# EAGLE board simulador (EAGLE 9.6.2)
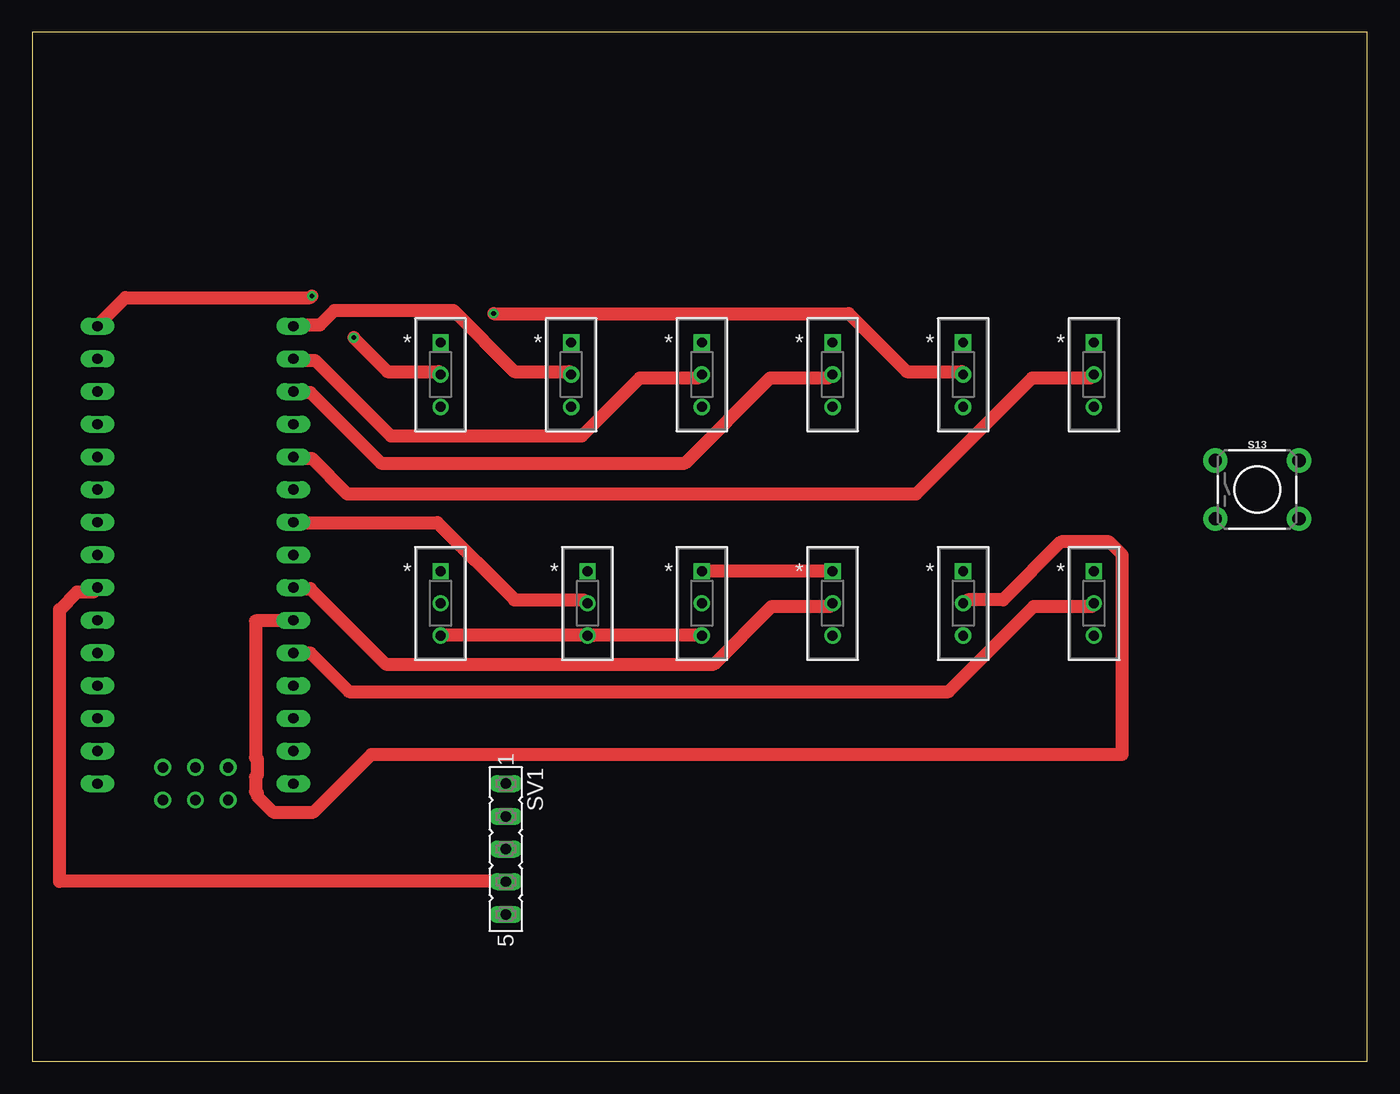
[diagram p0: board, top side]
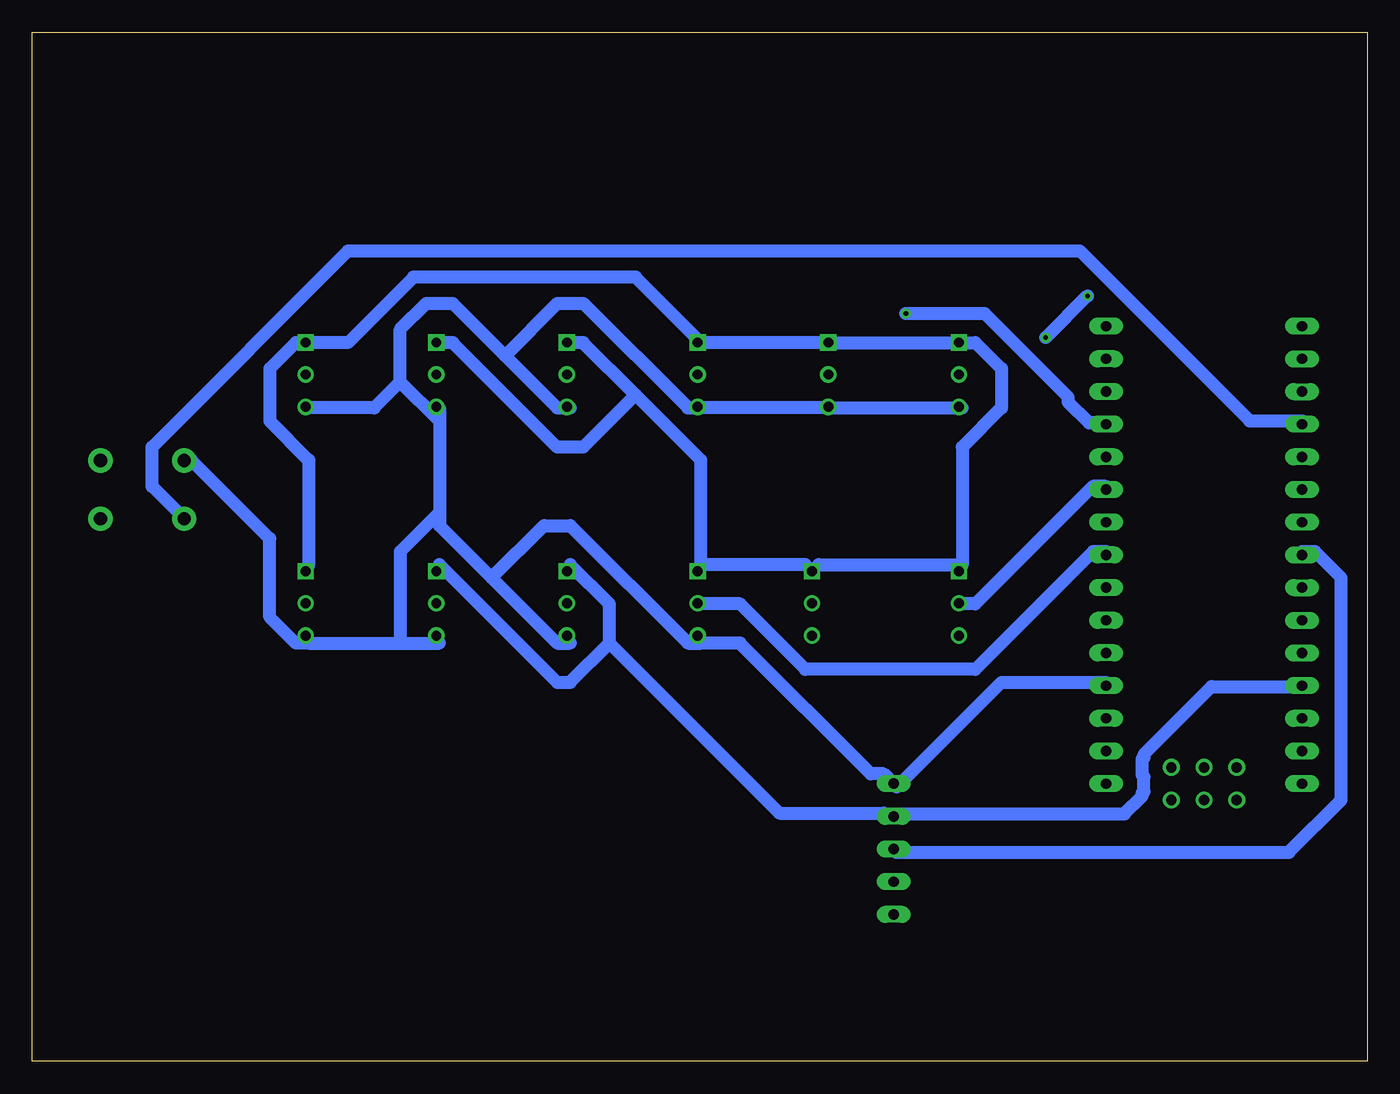
[diagram p1: board, bottom side, seen from below]

Size 103.81 x 80 mm. Coordinates in mm from the lower left corner, seen from the top.
Outline: 0,0 103.81,0 103.81,80 0,80 0,0
Copper layers (1*16): Top 0.035mm / dielectric 1.5mm / Bottom 0.035mm
Design rules "default *": minimum track width 40mil, minimum drill 0.35mm, track to track 40mil, track to pad 40mil, pad to pad 40mil, via to via 40mil, smd to smd 6mil, copper to edge 40mil, drill to drill 6mil, minimum pad ring 10mil, minimum via ring 8mil, stop-mask expansion 4mil, vias tented up to drill 0mil, thermal gap 10mil

## Footprints (pad centres in the part's own frame; a part is rotated, then mirrored left to right if it is on the bottom)
TACTILE_SWITCH_PTH_6.0MM_KIT = drill 1.016 pad 1.88: 1 -3.251,2.261; 2 3.251,2.261; 3 -3.251,-2.261; 4 3.251,-2.261
FE05-1 = drill 0.813 long: 1 -5.08,0; 2 -2.54,0; 3 0,0; 4 2.54,0; 5 5.08,0
1P2T_SS-12D00_CNK = drill 0.762 pad 1.27 square: 1 0,0 | drill 0.762 pad 1.27: 2 0,-2.489; 3 0,-5.004
NANO = drill 0.8 long: 3.3V -10.16,24.13; 5V -10.16,-1.27; A0 -10.16,19.05; A1 -10.16,16.51; A2 -10.16,13.97; A3 -10.16,11.43; A4 -10.16,8.89; A5 -10.16,6.35; A6 -10.16,3.81; A7 -10.16,1.27; AREF -10.16,21.59; D2 5.08,1.27; D3 5.08,3.81; D4 5.08,6.35; D5 5.08,8.89; D6 5.08,11.43; D7 5.08,13.97; D8 5.08,16.51; D9 5.08,19.05; D10 5.08,21.59; D11 5.08,24.13; D12 5.08,26.67; D13 -10.16,26.67; GND -10.16,-6.35; GND1 5.08,-1.27; RAW -10.16,-8.89; RST -10.16,-3.81; RST1 5.08,-3.81; RX1 5.08,-6.35; TX0 5.08,-8.89 | drill 0.8: ICSP1 -5.08,-10.16; ICSP2 -5.08,-7.62; ICSP3 -2.54,-10.16; ICSP4 -2.54,-7.62; ICSP5 0,-10.16; ICSP6 0,-7.62

## Placement (x,y rotation side)
S13  MOMENTARY-SWITCH-SPST-PTH-6.0MM-KIT  [TACTILE_SWITCH_PTH_6.0MM_KIT]  95.25,44.45 0 top
SV1  Display  [FE05-1]  36.83,16.51 270 top
SW1  SS-12D00-G_4_E  [1P2T_SS-12D00_CNK]  31.75,55.88 0 top
SW2  SS-12D00-G_4_E  [1P2T_SS-12D00_CNK]  41.91,55.88 0 top
SW3  SS-12D00-G_4_E  [1P2T_SS-12D00_CNK]  52.07,55.88 0 top
SW4  SS-12D00-G_4_E  [1P2T_SS-12D00_CNK]  62.23,55.88 0 top
SW5  SS-12D00-G_4_E  [1P2T_SS-12D00_CNK]  72.39,55.88 0 top
SW6  SS-12D00-G_4_E  [1P2T_SS-12D00_CNK]  82.55,55.88 0 top
SW7  SS-12D00-G_4_E  [1P2T_SS-12D00_CNK]  31.75,38.1 0 top
SW8  SS-12D00-G_4_E  [1P2T_SS-12D00_CNK]  43.18,38.1 0 top
SW9  SS-12D00-G_4_E  [1P2T_SS-12D00_CNK]  52.07,38.1 0 top
SW10  SS-12D00-G_4_E  [1P2T_SS-12D00_CNK]  62.23,38.1 0 top
SW11  SS-12D00-G_4_E  [1P2T_SS-12D00_CNK]  72.39,38.1 0 top
SW12  SS-12D00-G_4_E  [1P2T_SS-12D00_CNK]  82.55,38.1 0 top
U$1  NANO  [NANO]  15.24,30.48 0 top

## Library data of the parts
S13 = SparkFun-Switches; PROD_ID: SWCH-08441; SF_SKU: COM-00097
SV1 = con-lsta; OC_FARNELL: unknown; OC_NEWARK: unknown
SW1-SW12 = untitled; COPYRIGHT: Copyright (C) 2025 Ultra Librarian. All rights reserved.; MANUFACTURER_PART_NUMBER: SS-12D00-G 4 E; MFR_NAME: C&K Components; TYPE: Slide Switches
U$1 = Arduino-clone

## Nets
N$1: SV1.2 SW1.1 SW2.1 SW3.1 SW4.1 SW5.1 SW6.1 SW7.1 SW8.1 SW9.1 SW10.1 SW11.1 SW12.1 U$1.5V
N$2: S13.3 U$1.A0
N$3: SV1.3 U$1.A4
N$4: SV1.4 U$1.A5
N$5: S13.1 SV1.1 SW1.3 SW2.3 SW3.3 SW4.3 SW5.3 SW6.3 SW7.3 SW8.3 SW9.3 SW10.3 SW11.3 SW12.3 U$1.GND1
N$6: SW1.2 U$1.D13
N$7: SW2.2 U$1.D12
N$8: SW3.2 U$1.D11
N$9: SW7.2 U$1.D7
N$10: SW4.2 U$1.D10
N$11: SW5.2 U$1.D9
N$12: SW6.2 U$1.D8
N$13: SW8.2 U$1.D6
N$14: SW9.2 U$1.D5
N$15: SW10.2 U$1.D4
N$16: SW11.2 U$1.D3
N$17: SW12.2 U$1.D2

## Tracks (layer width: path | path; a pad name or v marks a point on that pad's centre or on a via)
N$1
  Top 1.016: SW10.1 62.12,38.12 52.12,38.12 SW9.1
  Bottom 1.016: 31.5,38.61 42.67,38.61 SW8.1 43.69,38.61 51.82,38.61 | SW4.1 60.96,55.88 56.9,51.82 | 56.9,51.82 51.82,46.74 51.82,38.61 | 51.82,38.61 SW9.1 | SW5.1 71.12,55.88 62.99,47.75 60.96,47.75 56.9,51.82 | SW12.1 82.3,38.61 82.3,46.74 85.34,49.78 85.34,53.85 83.31,55.88 SW6.1 79.25,55.88 74.17,60.96 56.9,60.96 51.82,55.88 | 51.82,55.88 SW2.1 SW1.1 30.48,55.88 28.45,53.85 28.45,50.8 31.5,47.75 31.5,38.61 | 51.82,55.88 SW3.1 | 31.5,38.61 SW7.1 | 58.93,32.51 58.93,35.56 61.98,38.61 SW10.1 | 58.93,32.51 61.98,29.46 62.99,29.46 72.14,38.61 SW11.1 | 58.93,32.51 45.72,19.3 37.59,19.3 SV1.2 36.38,19.25 18.88,19.25 17.5,20.62 17.5,20.88 17.38,21 17.38,22.12 17.5,22.25 17.5,23.5 17.38,23.62 17.38,23.88 12.12,29.12 5.12,29.12 U$1.5V
N$2
  Bottom 1.016: U$1.A0 5.08,49.78 9.14,49.78 22.35,62.99 79.25,62.99 94.49,47.75 94.49,44.7 92.46,42.67 S13.3
N$3
  Bottom 1.016: U$1.A4 5.08,39.62 4.06,39.62 2.03,37.59 2.03,20.32 6.1,16.26 36.58,16.26 SV1.3
N$4
  Top 1.016: U$1.A5 4.75,36.5 3.5,36.5 2.12,35.12 2.12,14 36.75,14 SV1.4
N$5
  Top 1.016: SW7.3 31.75,33.12 43.12,33.12 SW8.3 43.62,33.12 52,33.12 SW9.3
  Bottom 1.016: 51.82,32.51 48.77,32.51 38.61,22.35 37.59,22.35 SV1.1 36.58,21.34 28.45,29.46 20.32,29.46 U$1.GND1 | 82.3,32.51 75.18,32.51 | 75.18,32.51 72.14,32.51 SW11.3 | 82.3,32.51 83.31,32.51 85.34,34.54 85.34,40.64 91.44,46.74 S13.1 | 82.3,32.51 SW12.3 | 41.66,50.8 31.5,50.8 SW1.3 | 41.66,50.8 51.82,50.8 | 41.66,50.8 SW2.3 | 68.07,37.59 72.14,41.66 72.14,42.67 | 68.07,37.59 62.99,32.51 61.98,32.51 SW10.3 | 72.14,49.78 72.14,50.8 SW5.3 | 72.14,49.78 72.14,42.67 | 67.06,54.86 71.12,58.93 73.15,58.93 75.18,56.9 75.18,52.83 | 67.06,54.86 62.99,50.8 61.98,50.8 SW4.3 | 72.14,49.78 75.18,52.83 | 75.18,52.83 77.22,50.8 82.3,50.8 SW6.3 | 51.82,50.8 52.83,50.8 60.96,58.93 62.99,58.93 67.06,54.86 | 51.82,50.8 SW3.3 | 75.18,32.51 75.18,39.62 72.14,42.67 | 51.82,32.51 52.83,32.51 61.98,41.66 64.01,41.66 68.07,37.59 | 51.82,32.51 SW9.3
N$6  (via drill 0.35)
  Top 1.016: v25,56.25 27.62,53.62 31.62,53.62 31.75,53.5 SW1.2 | v21.75,59.5 21.62,59.38 7.25,59.38 5.12,57.25 U$1.D13
  Bottom 1.016: v21.75,59.5 v25,56.25
N$7
  Top 1.016: SW2.2 41.88,53.5 41.75,53.62 37.5,53.62 32.75,58.38 23.5,58.38 22.38,57.25 20.38,57.25 U$1.D12
N$8
  Top 1.016: SW3.2 52,53.38 51.75,53.12 47.25,53.12 42.75,48.62 27.88,48.62 22,54.5 20.38,54.5 U$1.D11
N$9
  Bottom 1.016: SW7.2 31.5,35.56 30.48,35.56 21.34,44.7 20.32,44.7 U$1.D7
N$10
  Top 1.016: SW4.2 62.12,53.38 61.88,53.12 57.38,53.12 50.75,46.5 27.12,46.5 21.62,52 20.38,52 U$1.D10
N$11  (via drill 0.35)
  Top 1.016: v35.88,58.12 63.5,58.12 68,53.62 72.25,53.62 72.38,53.5 SW5.2
  Bottom 1.016: v35.88,58.12 29.75,58.12 23.25,51.62 23.25,51.25 21.62,49.62 20.38,49.62 U$1.D9
N$12
  Top 1.016: SW6.2 82.5,53.38 82.25,53.12 77.75,53.12 68.75,44.12 24.5,44.12 21.75,46.88 20.38,46.88 U$1.D8
N$13
  Top 1.016: SW8.2 43.12,35.62 42.88,35.88 37.5,35.88 31.5,41.88 20.38,41.88 U$1.D6
N$14
  Bottom 1.016: SW9.2 51.82,35.56 48.77,35.56 43.69,30.48 30.48,30.48 21.34,39.62 20.32,39.62 U$1.D5
N$15
  Top 1.016: SW10.2 62.12,35.5 62,35.38 57.5,35.38 53,30.88 27.5,30.88 21.62,36.75 20.38,36.75 U$1.D4
N$16
  Top 1.016: SW11.2 72.5,35.62 72.75,35.88 75.5,35.88 80,40.38 83.75,40.38 84.75,39.38 84.75,23.88 26.38,23.88 21.88,19.38 18.75,19.38 17.5,20.62 17.5,20.88 17.38,21 17.38,22.12 17.5,22.25 17.5,23.5 17.38,23.62 17.38,34.25 20.25,34.25 U$1.D3
N$17
  Top 1.016: U$1.D2 21.62,31.75 24.62,28.75 71.25,28.75 77.88,35.38 82.38,35.38 82.5,35.5 SW12.2